# Altium PCB PCB1.PcbDoc (part 1 of 2)
Units mil, origin at the board's own origin, x right, y up, seen from the top; angles counter-clockwise.
Board outline 3975 x 3295 mil, 2 copper layers (Top Layer, Bottom Layer); 85 components, 105 nets, 658 pads, 194 vias.
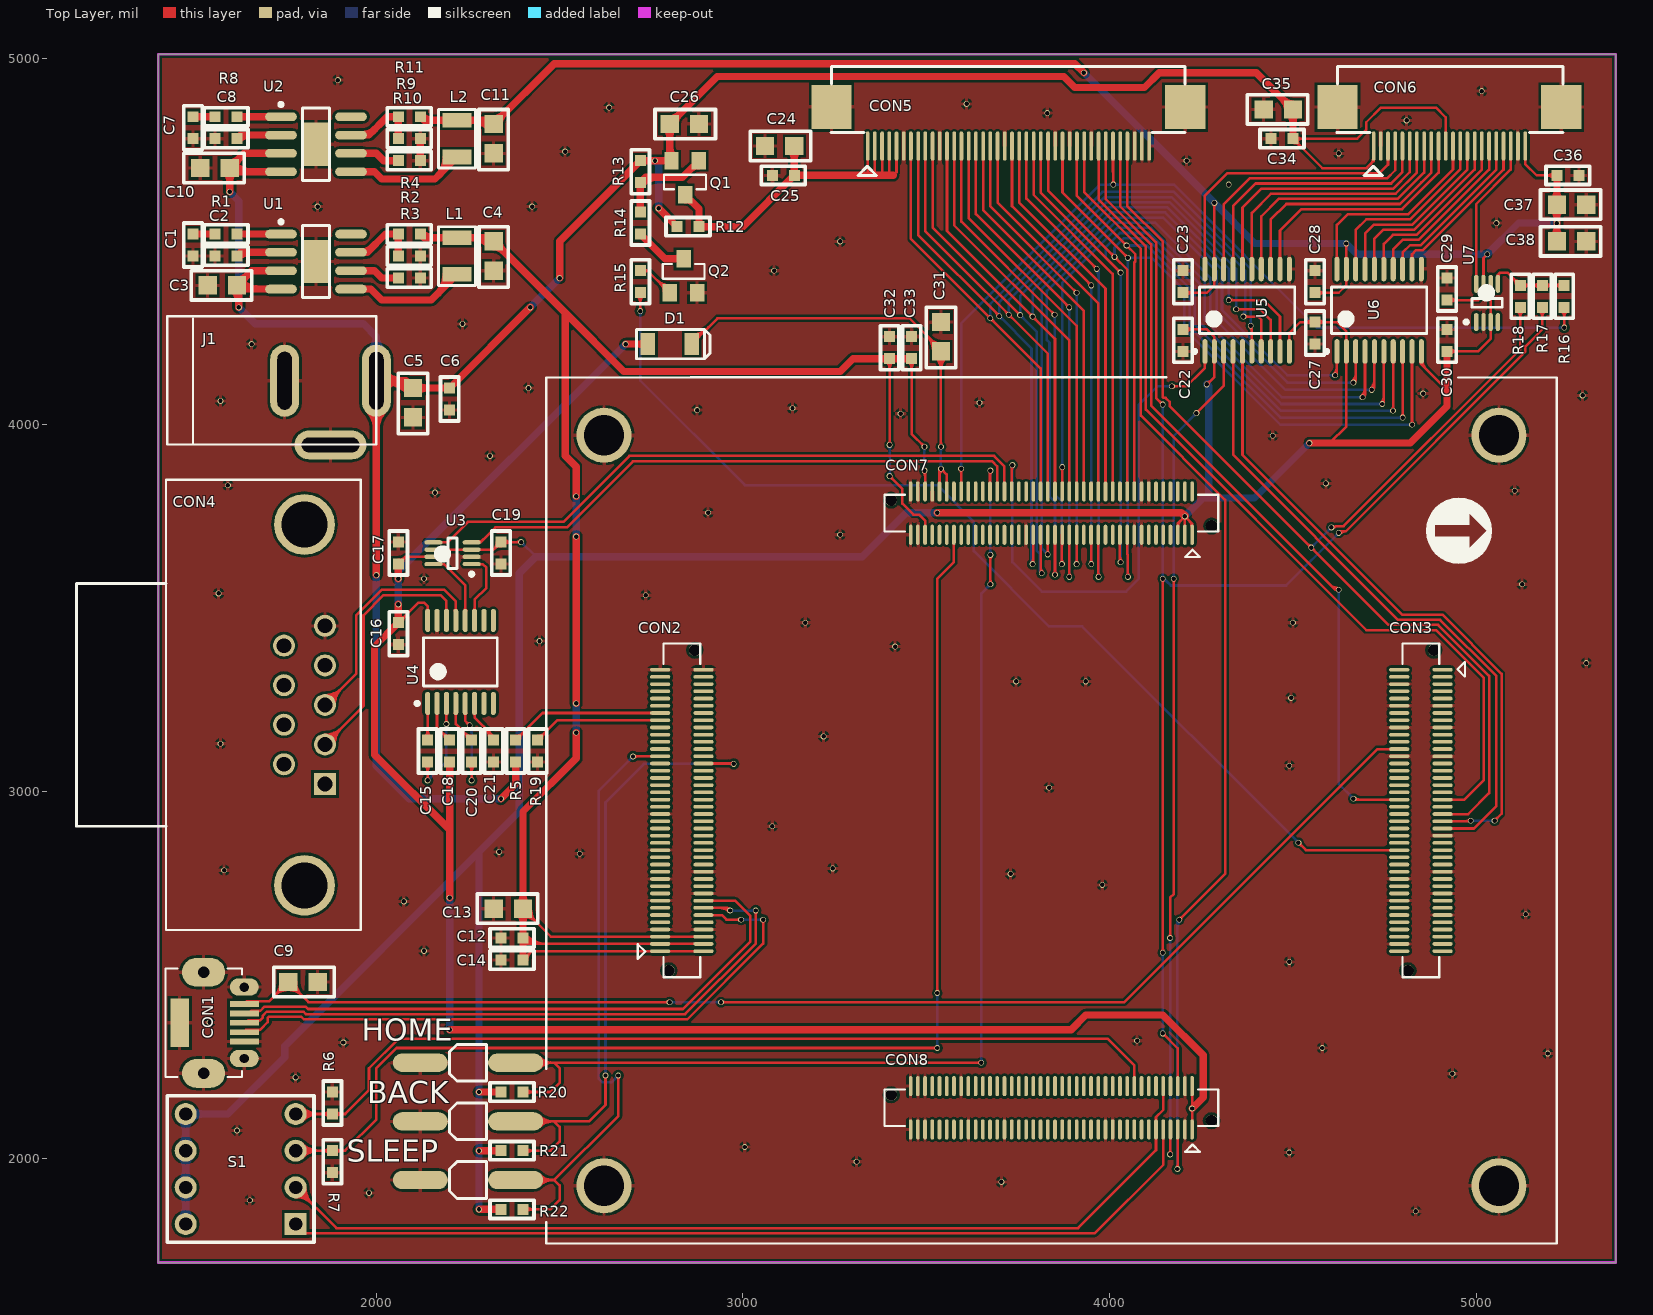
[diagram p0: Top Layer view]
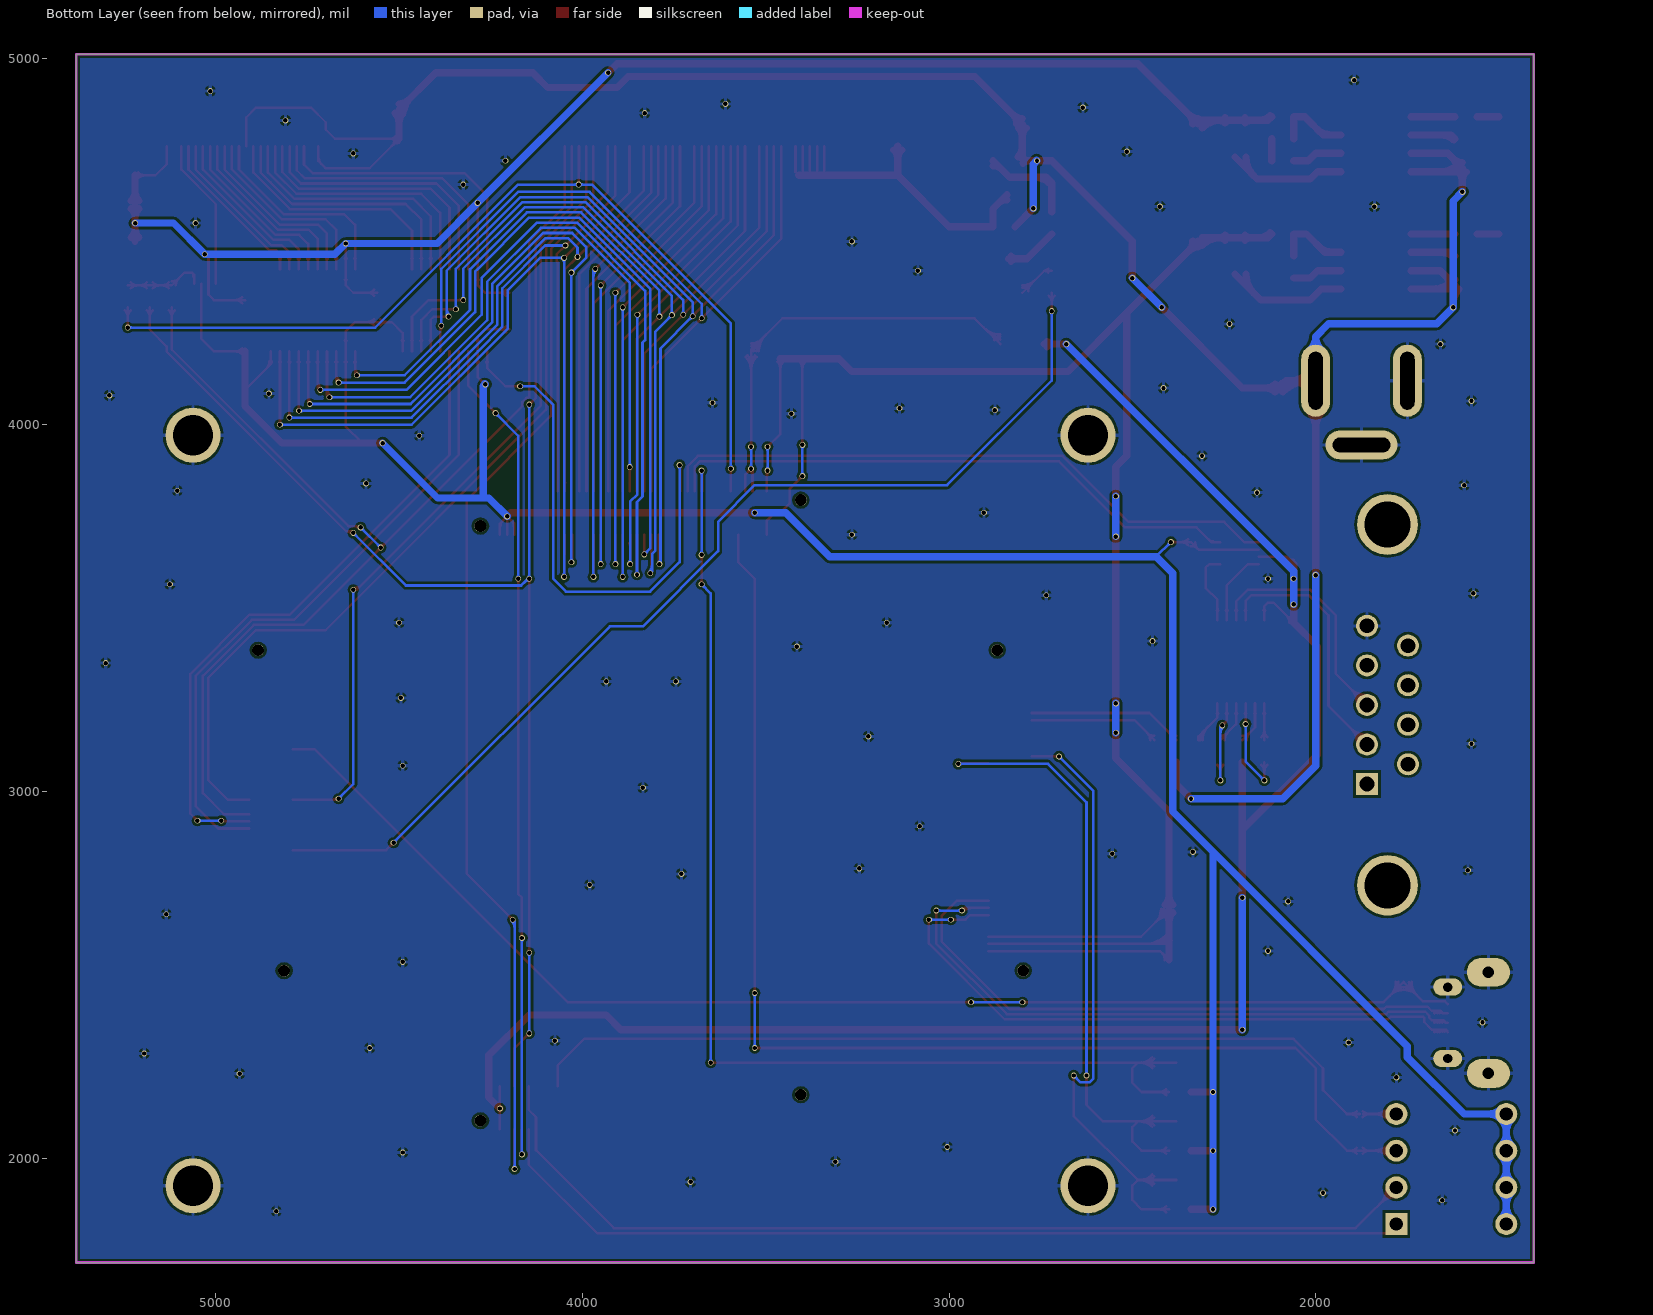
[diagram p1: Bottom Layer view, seen from below]

## Layer stack, top to bottom
Top Layer: signal copper 1.4
Dielectric: dielectric 12.6, FR-4, Dk 4.8
Bottom Layer: signal copper 1.4

## Board outline
1405,1715 1405,5010 5380,5010 5380,1715

## Design rules (kind name [scope] priority, off if disabled: settings)
Clearance [All] p1: gap=7
ComponentClearance [All] p1 off: gap=10 collisioncheckmode=3 verticalgap=10 showdistances=FALSE
HoleSize [All] p1: absolutevalues=TRUE maxlimit=1000 minlimit=1 maxpercent=80.000 minpercent=20.000
MinimumSolderMaskSliver [All] p1 off: minsoldermaskwidth=10
PolygonConnect [All] p1: connectstyle=Relief reliefconductorwidth=10 reliefentries=4 polygonreliefangle="90 Angle"
RoutingVias [All] p1: holewidth=12 width=16 viastyle="Through Hole" minholewidth=12 minwidth=16 maxholewidth=12 maxwidth=16
SilkToSilkClearance [All] p1 off: silktosilkclearance=10
SilkscreenOverComponentPads [All] p1 off: minsilkscreentomaskgap=10
SolderMaskExpansion [All] p1: expansion=4
Width Width-OTHER [Not InNetClass('POWER')] p1: maxlimit=7 minlimit=7 preferedwidth=7
Width Width-POWER [InNetClass('POWER')] p2: maxlimit=20 minlimit=7 preferedwidth=20
23 further rules are at their usual default settings.

## Classes and differential pairs
net class POWER: DC33V GND NetC1_1 NetC2_1 NetC7_1 NetC8_1 NetL1_1 NetL2_1 NetQ1_1 NetQ2_3 NetR1_2 NetR2_1 NetR3_1 NetR8_2 NetR9_1 NetR10_1 VDD1V8_EXT VDD25 VSYS VSYS_K VSYS_LCD

## Components (designator, comment, footprint, x,y, rotation, side; value= is the part's Value field where it differs from the comment)
BACK "KEY" KEY(3*6*2.5) 2380,2100 r180 top (schematic designator K2)
C1 "Cap" 0603 1500,4520 r270 top
C2 "Cap" 0603 1620,4460 r180 top
C3 "Cap" 0805 1540,4380 r0 top
C4 "Cap" 0805 2320,4420 r90 top
C5 "Cap" 0805 2100,4020 r90 top
C6 "Cap" 0603 2200,4100 r270 top
C7 "Cap" 0603 1500,4840 r270 top
C8 "Cap" 0603 1620,4780 r180 top
C9 "Cap" 0805 1840,2480 r180 top
C10 "Cap" 0805 1520,4700 r0 top
C11 "Cap" 0805 2320,4740 r90 top
C12 "Cap" 0603 2400,2600 r180 top
C13 "Cap" 0805 2320,2680 r0 top
C14 "Cap" 0603 2400,2540 r180 top
C15 "Cap" 0603 2140,3080 r90 top
C16 "Cap" 0603 2060,3460 r270 top
C17 "Cap" 0603 2060,3680 r270 top
C18 "Cap" 0603 2200,3080 r90 top
C19 "Cap" 0603 2340,3620 r90 top
C20 "Cap" 0603 2260,3140 r270 top
C21 "Cap" 0603 2320,3080 r90 top
C22 "Cap" 0603 4200,4200 r90 top
C23 "Cap" 0603 4200,4360 r90 top
C24 "Cap" 0805 3140,4760 r180 top
C25 "Cap" 0603 3080,4680 r0 top
C26 "Cap" 0805 2880,4820 r180 top
C27 "Cap" 0603 4560,4220 r90 top
C28 "Cap" 0603 4560,4360 r90 top
C29 "Cap" 0603 4920,4400 r270 top
C30 "Cap" 0603 4920,4260 r270 top
C31 "Cap" 0805 3540,4200 r90 top
C32 "Cap" 0603 3400,4180 r90 top
C33 "Cap" 0603 3460,4180 r90 top
C34 "Cap" 0603 4440,4780 r0 top
C35 "Cap" 0805 4420,4860 r0 top
C36 "Cap" 0603 5220,4680 r0 top
C37 "Cap" 0805 5220,4600 r0 top
C38 "Cap" 0805 5220,4500 r0 top
CON1 "USB-CON" USB-CON 1640,2420 r0 top
CON2 "PCB-CON-80" PCB-CON-80 2774.21,2564.18 r90 top
CON3 "PCB-CON-80" PCB-CON-80 4908.07,3331.89 r270 top
CON4 "USART-CON" USART-CON 1860,3020 r270 top
CON5 "FPC-CON-40P" FPC-CON-40P 3340,4760 r0 top
CON6 "FPC-CON-22P" FPC-CON-22P 4720,4760 r0 top
CON7 "PCB-CON-80" PCB-CON-80 4225,3700 r180 top
CON8 "PCB-CON-80" PCB-CON-80 4225,2077.95 r180 top
D1 "1N4148" 1206 2800,4220 r0 top
HOME "KEY" KEY(3*6*2.5) 2380,2260 r180 top (schematic designator K1)
J1 "JACK-DC" JACK-DC 2000,4120 r180 top
L1 "Inductor" 1008 2220,4460 r90 top
L2 "Inductor" 1008 2220,4780 r90 top
Q1 "AO3415A" SOT-23 2880,4720 r180 top
Q2 "9014" SOT-23 2800,4360 r0 top
R1 "Res2" 0603 1560,4520 r0 top
R2 "Res2" 0603 2060,4460 r0 top
R3 "Res2" 0603 2060,4400 r0 top
R4 "Res2" 0603 2120,4520 r180 top
R5 "Res2" 0603 2380,3080 r90 top
R6 "Res2" 0603 1880,2120 r90 top
R7 "Res2" 0603 1880,1960 r90 top
R8 "Res2" 0603 1560,4840 r0 top
R9 "Res2" 0603 2060,4780 r0 top
R10 "Res2" 0603 2060,4720 r0 top
R11 "Res2" 0603 2120,4840 r180 top
R12 "Res2" 0603 2820,4540 r0 top
R13 "Res2" 0603 2720,4660 r90 top
R14 "Res2" 0603 2720,4520 r90 top
R15 "Res2" 0603 2720,4360 r90 top
R16 "Res2" 0603 5240,4320 r90 top
R17 "Res2" 0603 5180,4320 r90 top
R18 "Res2" 0603 5120,4320 r90 top
R19 "Res2" 0603 2440,3080 r90 top
R20 "Res2" 0603 2340,2180 r0 top
R21 "Res2" 0603 2340,2020 r0 top
R22 "Res2" 0603 2340,1860 r0 top
S1 "SW DIP-4" SW-4 1780,1820 r90 top
SLEEP "KEY" KEY(3*6*2.5) 2380,1940 r180 top (schematic designator K3)
U1 "RT8065" RT8065(SOP8) 1740,4520 r0 top
U2 "RT8065" RT8065(SOP8) 1740,4840 r0 top
U3 "TXS0102" TXS0102(SOP8) 2260,3620 r180 top
U4 "MAX3232" MAX3232(SOP16) 2140,3240 r90 top
U5 "TXS0108E" TXS0108E(SOP20) 4260,4200 r90 top
U6 "TXS0108E" TXS0108E(SOP20) 4620,4200 r90 top
U7 "TXS0102" TXS0102(SOP8) 5000,4280 r90 top

## Footprints (in the part's own frame and the unit in brackets; to place one, negate y for a bottom-side part, rotate by r counter-clockwise, add the part's x,y. Pads: shape width x height; smd on the part's side, far side on the other; paste and mask are expansions set on the pad)
0603 [mil]
  rect 30x30 smd: 1(0,0) 2(60,0)
  silkscreen extent -30,-25 90,25
0805 [mil]
  rect 50x50 smd: 1(0,0) 2(80,0)
  silkscreen extent -45,-40 120,40
1008 [mil]
  rect 40x80 smd: 1(-50,0) 2(50,0)
  silkscreen extent -80,-50 80,50
1206 [mil]
  rect 40x60 smd: 1(-60,0) 2(60,0)
  silkscreen extent -90,-40 110,40
FPC-CON-22P [mil]
  oval 10x80 smd: 1(0,0) 2(19.69,0) 3(39.37,0) 4(59.06,0) 5(78.74,0) 6(98.43,0) 7(118.11,0) 8(137.8,0) 9(157.48,0) 10(177.16,0) 11(196.85,0) 12(216.53,0) 13(236.22,0) 14(255.9,0) 15(275.59,0) 16(295.27,0) 17(314.96,0) 18(334.65,0) 19(354.33,0) 20(374.02,0) 21(393.7,0) 22(413.39,0)
  rect 110x120 smd: 23(-98.43,106.3) 24(511.81,106.3)
  silkscreen extent -100,-80 516,217
FPC-CON-40P [mil]
  oval 10x80 smd: 1(0,0) 2(19.68,0) 3(39.37,0) 4(59.05,0) 5(78.74,0) 6(98.43,0) 7(118.11,0) 8(137.8,0) 9(157.48,0) 10(177.16,0) 11(196.85,0) 12(216.53,0) 13(236.22,0) 14(255.91,0) 15(275.59,0) 16(295.28,0) 17(314.96,0) 18(334.64,0) 19(354.33,0) 20(374.01,0) 21(393.7,0) 22(413.39,0) 23(433.07,0) 24(452.76,0) 25(472.44,0) 26(492.13,0) 27(511.81,0) 28(531.5,0) 29(551.18,0) 30(570.87,0) 31(590.55,0) 32(610.24,0) 33(629.92,0) 34(649.61,0) 35(669.29,0) 36(688.98,0) 37(708.66,0) 38(728.35,0) 39(748.03,0) 40(767.72,0)
  rect 110x120 smd: 41(-98.43,106.3) 42(866.14,106.3)
  silkscreen extent -100,-80 866,217
JACK-DC [mm]
  oval 2x5 hole 1 slot 4 at 90 deg: 1(0,0) 2(6.35,0)
  oval 5x2 hole 1 slot 4 at 0 deg: 3(3.175,4.445)
  silkscreen extent 0,-4.47 14.48,4.42
KEY(3*6*2.5) [mil]
  oval 150x50 smd: 1(0,0) 2(260,0)
  silkscreen extent 80,-50 180,50
MAX3232(SOP16) [mm] "SOP, 16-Leads, Body 5.1x4.5mm (max), Pitch 0.65mm, IPC Medium Density"
  oval 1.6x0.35 smd: 1(0,0) 2(0,-0.65) 3(0,-1.3) 4(0,-1.95) 5(0,-2.6) 6(0,-3.25) 7(0,-3.9) 8(0,-4.55) 9(5.75,-4.55) 10(5.75,-3.9) 11(5.75,-3.25) 12(5.75,-2.6) 13(5.75,-1.95) 14(5.75,-1.3) 15(5.75,-0.65) 16(5.75,0)
  silkscreen extent -0.12,-4.82 4.55,0.85, body extent 0.63,-4.82 5.13,0.28, height 2.65
PCB-CON-80 [mil]
  oval 10x55 smd: 1(0,0) 2(0,-118.12) 3(19.69,0) 4(19.69,-118.12) 5(39.37,0) 6(39.37,-118.12) 7(59.06,0) 8(59.06,-118.12) 9(78.74,0) 10(78.74,-118.12) 11(98.43,0) 12(98.43,-118.12) 13(118.11,0) 14(118.11,-118.12) 15(137.8,0) 16(137.8,-118.12) 17(157.48,0) 18(157.48,-118.12) 19(177.17,0) 20(177.17,-118.12) 21(196.85,0) 22(196.85,-118.12) 23(216.54,0) 24(216.54,-118.12) 25(236.22,0) 26(236.22,-118.12) 27(255.91,0) 28(255.91,-118.12) 29(275.59,0) 30(275.59,-118.12) 31(295.28,0) 32(295.28,-118.12) 33(314.96,0) 34(314.96,-118.12) 35(334.65,0) 36(334.65,-118.12) 37(354.33,0) 38(354.33,-118.12) 39(374.02,0) 40(374.02,-118.12) 41(393.7,0) 42(393.7,-118.12) 43(413.39,0) 44(413.39,-118.12) 45(433.07,0) 46(433.07,-118.12) 47(452.76,0) 48(452.76,-118.12) 49(472.44,0) 50(472.44,-118.12) 51(492.13,0) 52(492.13,-118.12) 53(511.81,0) 54(511.81,-118.12) 55(531.5,0) 56(531.5,-118.12) 57(551.18,0) 58(551.18,-118.12) 59(570.87,0) 60(570.87,-118.12) 61(590.55,0) 62(590.55,-118.12) 63(610.24,0) 64(610.24,-118.12) 65(629.92,0) 66(629.92,-118.12) 67(649.61,0) 68(649.61,-118.12) 69(669.29,0) 70(669.29,-118.12) 71(688.98,0) 72(688.98,-118.12) 73(708.66,0) 74(708.66,-118.12) 75(728.35,0) 76(728.35,-118.12) 77(748.03,0) 78(748.03,-118.12) 79(767.72,0) 80(767.72,-118.12)
  round 32 / inner round 60 / far side round 32 hole 32: " "(-53.15,-23.63) " "(820.87,-94.49)
  silkscreen extent -71,-109 839,61
RT8065(SOP8) [mm] "SOP, 8-Leads, Body 5.0x4.0mm (max), Pitch 1.27mm, IPC Medium Density"
  oval 2.2x0.6 smd: 1(0,0) 2(0,-1.27) 3(0,-2.54) 4(0,-3.81) 5(4.85,-3.81) 6(4.85,-2.54) 7(4.85,-1.27) 8(4.85,0)
  rect 2.1x3 smd: 9(2.425,-1.905)
  silkscreen extent -0.12,-4.41 3.35,0.97, body extent 0.43,-4.41 4.43,0.6, height 2.65
SOT-23 [mm]
  rect 1x1.2 smd: 1(0,0) 2(1.905,0) 3(0.965,2.349)
  silkscreen extent -0.48,0.97 2.41,1.98
SW-4 [mil]
  rect 60x60 hole 36: 1(0,0)
  round 60 hole 36: 2(100,0) 3(200,0) 4(300,0) 5(300,300) 6(200,300) 7(100,300) 8(0,300)
  silkscreen extent -50,-50 350,350
TXS0102(SOP8) [mm] "SSOP, 8-Leads, Body 2.1x2.4mm (max), Pitch 0.50mm, IPC Medium Density"
  oval 1.25x0.3 smd: 1(0,0) 2(0,-0.5) 3(0,-1) 4(0,-1.5) 5(2.65,-1.5) 6(2.65,-1) 7(2.65,-0.5) 8(2.65,0)
  silkscreen extent -0.13,-1.8 2.32,0.82, body extent 0.13,-1.8 2.53,0.3, height 2.65
TXS0108E(SOP20) [mm] "SOP, 20-Leads, Body 6.6x4.5mm (max), Pitch 0.65mm, IPC Medium Density"
  oval 1.7x0.35 smd: 1(0,0) 2(0,-0.65) 3(0,-1.3) 4(0,-1.95) 5(0,-2.6) 6(0,-3.25) 7(0,-3.9) 8(0,-4.55) 9(0,-5.2) 10(0,-5.85) 11(5.7,-5.85) 12(5.7,-5.2) 13(5.7,-4.55) 14(5.7,-3.9) 15(5.7,-3.25) 16(5.7,-2.6) 17(5.7,-1.95) 18(5.7,-1.3) 19(5.7,-0.65) 20(5.7,0)
  silkscreen extent -0.12,-6.22 4.45,0.85, body extent 0.6,-6.22 5.1,0.38, height 2.65
USART-CON [mil]
  rect 60x60 / inner round 60 / far side rect 60x60 hole 40: 1(0,0)
  round 60 hole 40: 2(-107.87,0) 3(-215.75,0) 4(-323.62,0) 5(-431.5,0) 6(-53.94,-111.81) 7(-161.81,-111.81) 8(-269.68,-111.81) 9(-377.56,-111.81)
  round 165.35 / inner round 60 / far side round 165.35 hole 125.98: 10(276.38,-55.91) 11(-707.87,-55.91)
  silkscreen extent -830,-678 398,98
USB-CON [mm] "MICROUSB-B-H4"
  rect 2x0.4 smd: 1(0,0) 2(0,-0.65) 3(0,-1.3) 4(0,-1.95) 5(0,-2.6)
  oval 2x1.2 / inner round 1.524 / far side oval 2x1.2 hole 0.65: 6(0,1.175) 7(0,-3.775)
  oval 3x2 / inner round 1.524 / far side oval 3x2 hole 0.8: 8(-2.825,2.2) 9(-2.825,-4.8)
  rect 1.3x3.35 smd: 10(-4.48,-1.3)
  silkscreen extent -5.45,-5.05 -0.15,2.45

## Part data
C1 C2 C3 C4 C5 C6 C7 C8 C9 C10 C11 C12 C13 C14 C15 C16 C17 C18 C19 C20 C21 C22 C23 C24 C25 C26 C27 C28 C29 C30 C31 C32 C33 C34 C35 C36 C37 C38: "Capacitor"
D1: library part Diode, "Default Diode"
R1 R2 R3 R4 R5 R6 R7 R8 R9 R10 R11 R12 R13 R14 R15 R16 R17 R18 R19 R20 R21 R22: "Resistor"
S1: "DIP Switch, 4 Position, SPST"

## Free pads (board coordinates)
  round 150 hole 110: 0(2620.97,1924.2) 0(2620.97,3971.44) 0(5061.91,1924.2) 0(5061.91,3971.44)

## Via types
v1: diameter 16, hole 12, Top Layer to Bottom Layer, 194 vias

## Nets (pads, with @x,y where several pads share a name; then routed paths per layer and width w, separated by ;. In a path a pad name is that pad's centre, name@x,y a point inside that pad or via, vN(x,y) a via of type N, cw(c..) or ccw(c..) an arc to the next point about the centre after c; other vN are vias at no path point)
ACOKB_CHARGER: CON2.65 R19.2 | length 400.2
  Top Layer w7: R19.2@2440,3140 2494.09,3194.09 CON2.65@2774.21,3194.09 ; R19.2@2440,3151.5 ccw(c2440,3179.26) 2459.63,3159.63 ccw(c2479.26,3140) R19.2@2451.5,3140
AP_SLEEP: CON7.67 R7.2 S1.3 | length 3744.1
  Top Layer w7: S1.3@1780,2020 R7.2@1880,2020 1915,2020 2000,2105 2000,2245 2055,2300 v1(3530,2300) ; S1.3@1788.84,2011.16 cw(c1810.18,1989.82) 1810.18,2020 cw(c1810.18,2050.18) S1.3@1788.84,2028.84 ; S1.3@1793.79,2006.21 cw(c1827.08,1972.92) 1827.08,2020 cw(c1827.08,2067.08) S1.3@1793.79,2033.79 ; S1.3@1798.74,2001.26 cw(c1843.98,1956.02) 1843.98,2020 cw(c1843.98,2083.98) S1.3@1798.74,2038.74 ; R7.2@1871.87,2011.87 ccw(c1852.24,1992.24) 1852.24,2020 ccw(c1852.24,2047.76) R7.2@1871.87,2028.13 ; R7.2@1888.13,2011.87 cw(c1907.76,1992.24) 1907.76,2020 cw(c1907.76,2047.76) R7.2@1888.13,2028.13 ; v1@3526.82,2296.82 ccw(c3519.14,2289.14) 3519.14,2300 ccw(c3519.14,2310.86) v1@3526.82,2303.18 ; v1@3526.82,2453.18 ccw(c3519.14,2460.86) 3530,2460.86 ccw(c3540.86,2460.86) v1@3533.18,2453.18 ; v1(3530,2450) 3530,3580 3575.39,3625.39 CON7.67@3575.39,3700
  Bottom Layer w7: v1@3526.82,2303.18 ccw(c3519.14,2310.86) 3530,2310.86 ccw(c3540.86,2310.86) v1@3533.18,2303.18 ; v1@3526.82,2446.82 cw(c3519.14,2439.14) 3530,2439.14 cw(c3540.86,2439.14) v1@3533.18,2446.82 ; v1(3530,2300) v1(3530,2450)
BK_LED: CON7.52 U5.1 | length 1550.1
  Top Layer w7: CON7.52@3732.87,3818.12 3732.87,3887.87 v1(3735,3890) ; 3732.87,3873.99 cw(c3751.01,3873.99) v1@3738.18,3886.82 ; v1(4170,4105) 4210,4105 4250,4145 4260,4155 U5.1@4260,4200 ; v1@4173.18,4101.82 cw(c4180.86,4094.14) 4180.86,4105 cw(c4180.86,4115.86) v1@4173.18,4108.18 ; U5.1@4257.6,4171.03 cw(c4251.82,4165.24) 4260,4165.24 cw(c4268.18,4165.24) U5.1@4262.4,4171.03
  Bottom Layer w7: v1@3731.82,3886.82 cw(c3724.14,3879.14) 3735,3879.14 cw(c3745.86,3879.14) v1@3738.18,3886.82 ; v1(3735,3890) 3735,3625 3815,3545 4045,3545 4080,3580 4080,4055 4130,4105 v1(4170,4105) ; v1@4166.82,4101.82 ccw(c4159.14,4094.14) 4159.14,4105 ccw(c4159.14,4115.86) v1@4166.82,4108.18
BUF_XURXD2: U3.8 U4.12 | length 219.6
  Top Layer w7: U3.8@2155.67,3620 2185,3620 2242.36,3562.64 U4.12@2242.36,3466.38 ; U4.12@2239.97,3493.38 ccw(c2234.18,3499.17) 2242.36,3499.17 ccw(c2250.55,3499.17) U4.12@2244.76,3493.38
BUF_XUTXD2: U3.1 U4.11 | length 213.9
  Top Layer w7: U3.1@2260,3620 2290,3620 2300,3610 2300,3555 2267.95,3522.95 U4.11@2267.95,3466.38 ; U4.11@2265.56,3493.38 ccw(c2259.77,3499.17) 2267.95,3499.17 ccw(c2276.14,3499.17) U4.11@2270.35,3493.38
CAM5M_RST: CON3.41 CON5.37 R18.1 | length 3437.5
  Top Layer w7: CON5.37@4048.66,4760 4048.66,4595.53 4145,4499.2 4145,4074.8 4146.3,4073.5 4152.66,4073.5 4163.5,4062.66 4163.5,4051.5 4761,3454 4895.8,3454 5035,3314.8 5035,2995 4978.2,2938.2 CON3.41@4908.07,2938.2 ; v1@4545.5,3665 ccw(c4534.64,3665) 4542.32,3672.68 ccw(c4550,3680.36) v1@4550,3669.5 ; v1@4550,3660.5 cw(c4550,3649.64) 4557.68,3657.32 cw(c4565.36,3665) v1@4554.5,3665 ; v1(4605,3720) 4613.84,3720 4617.34,3723.5 ; v1@4608.05,3723.31 ccw(c4612.59,3728.24) 4617.34,3723.5 ; R18.1@5111.87,4311.87 cw(c5092.24,4292.24) 5120,4292.24 cw(c5147.76,4292.24) R18.1@5128.13,4311.87 ; R18.1@5120,4320 5120,4205 4638.5,3723.5 4617.34,3723.5
  Bottom Layer w7: v1(4550,3665) v1(4605,3720) ; v1@4550,3669.5 ccw(c4550,3680.36) 4557.68,3672.68 ccw(c4565.36,3665) v1@4554.5,3665 ; v1@4600.5,3720 cw(c4589.64,3720) 4597.32,3712.32 cw(c4605,3704.64) v1@4605,3715.5
CHG_DOK: CON2.67 R5.2 | length 468.4
  Top Layer w7: R5.2@2380,3140 2453.78,3213.78 CON2.67@2774.21,3213.78 ; R5.2@2380,3151.5 ccw(c2380,3179.26) 2399.63,3159.63 ccw(c2419.26,3140) R5.2@2391.5,3140
CHG_EN: CON3.52 R15.1 | length 2999
  Top Layer w7: R15.1@2711.87,4351.87 cw(c2692.24,4332.24) 2720,4332.24 cw(c2747.76,4332.24) R15.1@2728.13,4351.87 ; v1@2716.82,4313.18 ccw(c2709.14,4320.86) 2720,4320.86 ccw(c2730.86,4320.86) v1@2723.18,4313.18 ; v1(2720,4310) R15.1@2720,4360 ; v1@4515,2855.5 cw(c4515,2844.64) 4522.68,2852.32 cw(c4530.36,2860) v1@4519.5,2860 ; v1(4515,2860) 4535.24,2839.76 CON3.52@4789.96,2839.76
  Bottom Layer w7: v1@2716.82,4306.82 cw(c2709.14,4299.14) 2720,4299.14 cw(c2730.86,4299.14) v1@2723.18,4306.82 ; v1(2720,4310) 2720,4120 3005,3835 3530,3835 3630,3735 3630,3655 3835,3450 3925,3450 v1(4515,2860) ; v1@4510.5,2860 ccw(c4499.64,2860) 4507.32,2867.68 ccw(c4515,2875.36) v1@4515,2864.5
CLOCK: CON6.19 U6.12 | length 462.7
  Top Layer w7: U6.12@4822.33,4453.38 ccw(c4816.54,4459.17) 4824.72,4459.17 ccw(c4832.91,4459.17) U6.12@4827.12,4453.38 ; U6.12@4824.72,4424.41 4824.72,4464.72 4836,4476 4854.59,4476 5074.33,4695.74 CON6.19@5074.33,4760
DATA0: CON6.15 U6.16 | length 511.1
  Top Layer w7: U6.16@4719.97,4453.38 ccw(c4714.18,4459.17) 4722.36,4459.17 ccw(c4730.55,4459.17) U6.16@4724.76,4453.38 ; U6.16@4722.36,4424.41 4722.36,4507.36 4747,4532 4831.4,4532 4995.59,4696.19 CON6.15@4995.59,4760
DATA1: CON6.14 U6.17 | length 525.3
  Top Layer w7: U6.17@4694.37,4453.38 ccw(c4688.59,4459.17) 4696.77,4459.17 ccw(c4704.96,4459.17) U6.17@4699.17,4453.38 ; U6.17@4696.77,4424.41 4696.77,4521.77 4721,4546 4825.6,4546 4975.9,4696.31 CON6.14@4975.9,4760
DATA2: CON6.13 U6.18 | length 536.7
  Top Layer w7: U6.18@4668.78,4453.38 ccw(c4663,4459.17) 4671.18,4459.17 ccw(c4679.36,4459.17) U6.18@4673.58,4453.38 ; U6.18@4671.18,4424.41 4671.18,4531.18 4700,4560 4819.8,4560 4956.22,4696.42 CON6.13@4956.22,4760
DATA3: CON6.12 U6.20 | length 576.2
  Top Layer w7: U6.20@4617.6,4453.38 ccw(c4611.82,4459.17) 4620,4459.17 ccw(c4628.18,4459.17) U6.20@4622.4,4453.38 ; U6.20@4620,4424.41 4620,4545 4649,4574 4814,4574 4936.53,4696.53 CON6.12@4936.53,4760
DATA4: CON6.10 U5.12 | length 688.4
  Top Layer w7: U5.12@4462.33,4453.38 ccw(c4456.54,4459.17) 4464.72,4459.17 ccw(c4472.91,4459.17) U5.12@4467.12,4453.38 ; U5.12@4464.72,4424.41 4464.72,4529.72 4523,4588 4797.4,4588 4803.4,4594 4803.49,4594 4897.16,4687.67 CON6.10@4897.16,4760
DATA5: CON6.9 U5.13 | length 711.4
  Top Layer w7: U5.13@4436.74,4453.38 ccw(c4430.95,4459.17) 4439.13,4459.17 ccw(c4447.32,4459.17) U5.13@4441.53,4453.38 ; U5.13@4439.13,4424.41 4439.13,4559.13 4482,4602 4791.6,4602 4850.65,4661.05 4850.75,4661.05 4877.48,4687.78 CON6.9@4877.48,4760
DATA6: CON6.8 U5.14 | length 722.8
  Top Layer w7: U5.14@4411.15,4453.38 ccw(c4405.36,4459.17) 4413.54,4459.17 ccw(c4421.73,4459.17) U5.14@4415.94,4453.38 ; U5.14@4413.54,4424.41 4413.54,4568.54 4461,4616 4785.8,4616 4844.85,4675.05 4844.95,4675.05 4857.8,4687.9 CON6.8@4857.8,4760
DATA7: CON6.7 U5.15 | length 734.1
  Top Layer w7: U5.15@4385.56,4453.38 ccw(c4379.77,4459.17) 4387.95,4459.17 ccw(c4396.14,4459.17) U5.15@4390.35,4453.38 ; U5.15@4387.95,4424.41 4387.95,4577.95 4440,4630 4780,4630 4838.11,4688.11 CON6.7@4838.11,4760
DC33V: C16.1 C17.2 C18.1 CON8.1 CON8.2 D1.1 U3.7 U4.16 | length 5337.8
  Top Layer w7: C16.1@2060,3460 2115,3515 2130,3515 2140,3505 U4.16@2140,3466.38 ; C16.1@2060,3471.5 ccw(c2060,3499.26) 2079.63,3479.63 ccw(c2099.26,3460) C16.1@2071.5,3460 ; C17.2@2060,3620 2079.68,3639.68 U3.7@2155.67,3639.68 ; C17.2@2060,3631.5 ccw(c2060,3659.26) 2079.63,3639.63 ccw(c2099.26,3620) C17.2@2071.5,3620 ; U4.16@2137.6,3493.38 ccw(c2131.82,3499.17) 2140,3499.17 ccw(c2148.18,3499.17) U4.16@2142.4,3493.38 ; v1@4221.82,2131.82 cw(c4214.14,2124.14) 4225,2124.14 cw(c4235.86,2124.14) v1@4228.18,2131.82 ; v1@4221.82,2138.18 ccw(c4214.14,2145.86) 4225,2145.86 ccw(c4235.86,2145.86) v1@4228.18,2138.18 ; CON8.1@4225,2077.95 v1(4225,2135) CON8.2@4225,2196.07
  Top Layer w20: v1(2060,3510) C16.1@2060,3460 1995,3395 1995,3100 2200,2895 ; v1(2060,3580) C17.2@2060,3620 ; v1(2200,2350) 3895,2350 3935,2390 4145,2390 4255,2280 4255,2165 v1(4225,2135) ; v1(2200,2710) 2200,2895 ; C18.1@2200,3080 2200,2895 ; v1(2680,4220) D1.1@2740,4220 ; D1.1@2732.93,4212.93 ccw(c2715.86,4195.86) 2715.86,4220 ccw(c2715.86,4244.14) D1.1@2732.93,4227.07
  Bottom Layer w20: v1(2060,3510) v1(2060,3580) 2060,3600 v1(2680,4220) ; v1(2200,2350) v1(2200,2710)
GND: BACK.2 C1.2 C2.2 C3.1 C4.1 C5.1 C6.2 C7.2 C8.2 C9.1 C10.1 C11.1 C12.2 C13.1 C14.2 C16.2 C17.1 C19.1 C21.1 C22.1 C23.2 C24.2 C25.1 C26.1 C27.1 C28.2 C29.1 C30.1 C31.2 C32.2 C33.2 C34.1 C35.1 C36.2 C37.2 C38.2 CON1.5 CON1.6 CON1.7 CON1.8 CON1.9 CON1.10 CON2.7 CON2.8 CON2.15 CON2.18 CON2.21 CON2.24 CON2.29 CON2.39 CON2.79 CON2.80 CON3.6 CON3.11 CON3.12 CON3.17 CON3.18 CON3.25 CON3.26 CON3.47 CON3.57 CON3.60 CON3.63 CON3.66 CON3.69 CON3.78 CON4.5 CON5.6 CON5.11 CON5.20 CON5.27 CON5.29 CON5.32 CON5.38 CON5.39 CON5.40 CON5.41 CON5.42 CON6.2 CON6.21 CON6.23 CON6.24 CON7.14 CON7.15 CON7.16 CON7.17 CON7.47 CON7.74 CON7.77 CON7.78 CON7.79 CON7.80 CON8.3 CON8.4 CON8.23 CON8.25 CON8.53 CON8.63 CON8.66 CON8.75 CON8.76 CON8.77 CON8.78 CON8.79 CON8.80 HOME.2 J1.2 J1.3 pad.0 Q2.2 R2.2 R3.2 R6.2 R7.1 R9.2 R10.2 R19.1 SLEEP.2 U1.9 U2.9 U3.2 U4.15 U5.11 U6.11 U7.2 | length 60
  Top Layer w20: R10.2@2120,4720 R9.2@2120,4780
  other v1: 4835,1855 1655,1885 1980,1905 3705,1935 3310,1990 4490,2015 3005,2030 1620,2075 1780,2220 4935,2230 5195,2285 4580,2300 1910,2315 4075,2320 1545,2370 4490,2535 2130,2565 5135,2665 2075,2700 3980,2745 3730,2775 1585,2785 3245,2790 2555,2830 2335,2835 3080,2905 3835,3010 4490,3070 1575,3130 3220,3150 4495,3255 3745,3300 3935,3300 5300,3350 3415,3395 2445,3410 3170,3460 4500,3460 2735,3535 1570,3540 5125,3565 2130,3580 3265,3700 2905,3760 2160,3815 5105,3820 1595,3835 4590,3840 2310,3915 4445,3970 3430,4030 2875,4040 3135,4045 3645,4060 1575,4065 5290,4080 4855,4085 2415,4100 1660,4220 2235,4275 3085,4420 3265,4500 5055,4550 1840,4595 2425,4595 4325,4655 4210,4720 4625,4740 2515,4745 4810,4830 3830,4850 2635,4865 3610,4875 5015,4910 1895,4940
GPC1_1: CON8.7 U5.3 | length 2468.3
  Top Layer w7: v1@4161.82,2013.18 ccw(c4151.86,2023.14) 4165.94,2023.14 ; v1@4161.82,2603.18 ccw(c4154.14,2610.86) 4165,2610.86 ccw(c4175.86,2610.86) v1@4168.18,2603.18 ; v1(4165,2010) 4165.94,2010.94 CON8.7@4165.94,2077.95 ; v1(4165,2600) 4165,2710 4175,2720 v1(4175,3580) ; 4165.94,2018.59 ccw(c4173.59,2018.59) v1@4168.18,2013.18 ; v1@4171.82,3576.82 cw(c4164.14,3569.14) 4175,3569.14 cw(c4185.86,3569.14) v1@4178.18,3576.82 ; v1(4236.66,4031.66) 4311.18,4106.18 U5.3@4311.18,4200 ; v1@4236.66,4036.16 ccw(c4236.66,4047.02) 4244.34,4039.34 ccw(c4252.02,4031.66) v1@4241.16,4031.66 ; U5.3@4308.78,4171.03 cw(c4303,4165.24) 4311.18,4165.24 cw(c4319.36,4165.24) U5.3@4313.58,4171.03
  Bottom Layer w7: v1@4161.82,2013.18 ccw(c4154.14,2020.86) 4165,2020.86 ccw(c4175.86,2020.86) v1@4168.18,2013.18 ; v1@4161.82,2596.82 cw(c4154.14,2589.14) 4165,2589.14 cw(c4175.86,2589.14) v1@4168.18,2596.82 ; v1(4165,2010) v1(4165,2600) ; v1@4171.82,3583.18 ccw(c4164.14,3590.86) 4175,3590.86 ccw(c4185.86,3590.86) v1@4178.18,3583.18 ; v1(4175,3580) 4175,3970 v1(4236.66,4031.66) ; v1@4232.16,4031.66 cw(c4221.29,4031.66) 4228.98,4023.98 cw(c4236.66,4016.29) v1@4236.66,4027.16
GPX0_0: CON5.36 CON8.6 R17.1 | length 4260.5
  Top Layer w7: CON5.36@4028.98,4760 4028.98,4595.42 4127,4497.4 4127,4073 v1(4145,4055) ; v1@4140.5,4055 ccw(c4129.64,4055) 4137.32,4062.68 ccw(c4145,4070.36) v1@4145,4059.5 ; v1@4141.82,2563.18 ccw(c4134.14,2570.86) 4145,2570.86 ccw(c4155.86,2570.86) v1@4148.18,2563.18 ; v1@4141.82,3576.82 cw(c4134.14,3569.14) 4145,3569.14 cw(c4155.86,3569.14) v1@4148.18,3576.82 ; v1@4145,2335.5 cw(c4145,2324.64) 4152.68,2332.32 cw(c4160.36,2340) v1@4149.5,2340 ; v1(4145,2340) 4185.63,2299.37 CON8.6@4185.63,2196.07 ; v1(4145,2560) v1(4145,3580) ; v1(4625,3705) 4629.5,3709.5 4644.3,3709.5 ; v1@4628.45,3702.11 cw(c4644.3,3688.81) 4644.3,3709.5 ; R17.1@5171.87,4311.87 cw(c5152.24,4292.24) 5180,4292.24 cw(c5207.76,4292.24) R17.1@5188.13,4311.87 ; R17.1@5180,4320 5180,4260 5134,4214 5134,4199.2 4644.3,3709.5
  Bottom Layer w7: v1@4141.82,2343.18 ccw(c4134.14,2350.86) 4145,2350.86 ccw(c4155.86,2350.86) v1@4148.18,2343.18 ; v1@4141.82,2556.82 cw(c4134.14,2549.14) 4145,2549.14 cw(c4155.86,2549.14) v1@4148.18,2556.82 ; v1@4141.82,3583.18 ccw(c4134.14,3590.86) 4145,3590.86 ccw(c4155.86,3590.86) v1@4148.18,3583.18 ; v1@4141.82,4051.82 cw(c4134.14,4044.14) 4145,4044.14 cw(c4155.86,4044.14) v1@4148.18,4051.82 ; v1(4145,2340) v1(4145,2560) ; v1@4145,3575.5 cw(c4145,3555.37) 4159.23,3569.6 ; v1(4145,4055) v1(4145,3580) 4148.84,3580 4167.34,3561.5 4481.5,3561.5 v1(4625,3705) ; v1@4620.5,3705 cw(c4609.64,3705) 4617.32,3697.32 cw(c4625,3689.64) v1@4625,3700.5
GYRO_INT: CON2.55 R22.2 SLEEP.1 | length 1939
  Top Layer w7: SLEEP.1@2380,1940 2485,1940 ; R22.2@2400,1860 2475,1860 2500,1885 2500,1925 2485,1940 ; R22.2@2408.13,1851.87 cw(c2427.76,1832.24) 2427.76,1860 cw(c2427.76,1887.76) R22.2@2408.13,1868.13 ; SLEEP.1@2440.25,1929.75 cw(c2465.01,1904.99) 2465.01,1940 cw(c2465.01,1975.01) SLEEP.1@2440.25,1950.25 ; SLEEP.1@2445.2,1924.8 cw(c2481.91,1888.09) 2481.91,1940 cw(c2481.91,1991.91) SLEEP.1@2445.2,1955.2 ; v1@2656.82,2221.82 cw(c2649.14,2214.14) 2660,2214.14 cw(c2670.86,2214.14) v1@2663.18,2221.82 ; v1(2660,2225) 2660,2115 2485,1940 ; v1(2700,3095) 2700.68,3095.68 CON2.55@2774.21,3095.68 ; v1@2703.18,3091.82 cw(c2712.5,3082.5) 2712.5,3095.68 ; v1@2703.18,3098.18 ccw(c2709.23,3104.23) 2709.23,3095.68
  Bottom Layer w7: v1@2655.5,2225 cw(c2644.64,2225) 2652.32,2217.32 cw(c2660,2209.64) v1@2660,2220.5 ; v1(2660,2225) 2641.5,2206.5 2617.34,2206.5 2606.5,2217.34 2606.5,3001.5 v1(2700,3095) ; v1@2695.5,3095 cw(c2684.64,3095) 2692.32,3087.32 cw(c2700,3079.64) v1@2700,3090.5
HSYNC: CON6.18 U6.13 | length 471.1
  Top Layer w7: U6.13@4796.74,4453.38 ccw(c4790.95,4459.17) 4799.13,4459.17 ccw(c4807.32,4459.17) U6.13@4801.53,4453.38 ; U6.13@4799.13,4424.41 4799.13,4469.13 4820,4490 4848.79,4490 5054.65,4695.85 CON6.18@5054.65,4760
I2C_SCL6: CON3.43 U5.5 | length 1863.8
  Top Layer w7: U5.5@4359.97,4171.03 cw(c4354.18,4165.24) 4362.36,4165.24 cw(c4370.55,4165.24) U5.5@4364.76,4171.03 ; U5.5@4362.36,4200 4362.36,3917.64 4798,3482 4907.4,3482 5069,3320.4 5069,2939 v1(5050,2920) ; CON3.43@4908.07,2918.51 4983.51,2918.51 v1(4985,2920) ; 4970.53,2918.51 ccw(c4970.53,2934.47) v1@4981.82,2923.18 ; v1@5050,2924.5 ccw(c5050,2935.36) 5057.68,2927.68 ccw(c5065.36,2920) v1@5054.5,2920
  Bottom Layer w7: v1(4985,2920) v1(5050,2920) ; v1@4988.18,2916.82 cw(c4995.86,2909.14) 4995.86,2920 cw(c4995.86,2930.86) v1@4988.18,2923.18 ; v1@5046.82,2916.82 ccw(c5039.14,2909.14) 5039.14,2920 ccw(c5039.14,2930.86) v1@5046.82,2923.18
I2C_SCL7: CON3.38 CON5.34 | length 2282.5
  Top Layer w7: CON5.34@3989.61,4760 3989.61,4614.99 4113,4491.6 4113,4052 4615,3550 v1(4625,3550) ; 4600.25,3564.75 ccw(c4625,3589.51) v1@4625,3554.5 ; 4612.2,3552.8 ccw(c4625,3565.61) v1@4625,3547.5 ; v1(4665,2980) 4667.43,2977.57 CON3.38@4789.96,2977.57 ; v1@4668.18,2983.18 ccw(c4681.74,2996.74) 4681.74,2977.57
  Bottom Layer w7: v1@4621.82,3546.82 cw(c4614.14,3539.14) 4625,3539.14 cw(c4635.86,3539.14) v1@4628.18,3546.82 ; v1(4625,3550) 4625,3020 v1(4665,2980) ; v1@4660.5,2980 ccw(c4649.64,2980) 4657.32,2987.68 ccw(c4665,2995.36) v1@4665,2984.5
I2C_SDA6: CON3.45 U5.4 | length 1789.7
  Top Layer w7: U5.4@4334.37,4171.03 cw(c4328.59,4165.24) 4336.77,4165.24 cw(c4344.96,4165.24) U5.4@4339.17,4171.03 ; U5.4@4336.77,4200 4336.77,3918.23 4787,3468 4901.6,3468 5055,3314.6 5055,2960 4993.83,2898.83 CON3.45@4908.07,2898.83
I2C_SDA7: CON3.37 CON5.33 | length 2409.9
  Top Layer w7: CON5.33@3969.92,4760 3969.92,4614.88 4099,4485.8 4099,4041 4700,3440 4890,3440 5020,3310 5020,3030 4967.57,2977.57 CON3.37@4908.07,2977.57
LCD_DEN: CON5.25 CON7.21 U6.6 | length 2686.1
  Top Layer w7: CON5.25@3812.44,4760 3812.44,4632.56 v1(4030,4415) ; v1@4025.5,4415 ccw(c4014.64,4415) 4022.32,4422.68 ccw(c4030,4430.36) v1@4030,4419.5 ; v1@4028.15,3626.85 CON7.21@4028.15,3700 ; 4028.15,3640.32 ccw(c4045.32,3640.32) v1@4033.18,3628.18 ; v1@4740.32,4059.68 ccw(c4721.89,4078.11) 4747.95,4078.11 ; v1(4743.5,4056.5) 4747.95,4060.95 U6.6@4747.95,4200 ; U6.6@4745.56,4171.03 cw(c4739.77,4165.24) 4747.95,4165.24 cw(c4756.14,4165.24) U6.6@4750.35,4171.03
  Bottom Layer w7: v1@4025.5,4415 ccw(c4014.64,4415) 4022.32,4422.68 ccw(c4030,4430.36) v1@4030,4419.5 ; v1@4026.82,3628.18 ccw(c4019.14,3635.86) 4030,3635.86 ccw(c4040.86,3635.86) v1@4033.18,3628.18 ; v1@4026.82,4411.82 cw(c4019.14,4404.14) 4030,4404.14 cw(c4040.86,4404.14) v1@4033.18,4411.82 ; v1(4030,3625) v1(4030,4415) 3990,4455 3990,4485 4028,4523 4107,4523 4246,4384 4246,4279 4460,4065 ; 4460.2,4065 4468.7,4056.5 v1(4743.5,4056.5) ; v1@4740.32,4053.32 ccw(c4732.64,4045.64) 4732.64,4056.5 ccw(c4732.64,4067.36) v1@4740.32,4059.68
LCD_HSYNC: CON5.30 CON7.18 U6.8 | length 2296.7
  Top Layer w7: CON5.30@3910.87,4760 3910.87,4624.13 v1(4046.22,4488.78) 4070,4465 4070,4445 4067.52,4442.52 CON7.18@4067.52,3818.12 ; v1@4041.72,4488.78 ccw(c4030.85,4488.78) 4038.53,4496.47 ccw(c4046.22,4504.15) v1@4046.22,4493.28 ; v1@4046.22,4484.28 cw(c4046.22,4473.42) 4053.9,4481.1 cw(c4061.58,4488.78) v1@4050.72,4488.78 ; v1@4796.32,4022.68 ccw(c4789.52,4029.48) 4799.13,4029.48 ; U6.8@4796.74,4171.03 cw(c4790.95,4165.24) 4799.13,4165.24 cw(c4807.32,4165.24) U6.8@4801.53,4171.03 ; 4799.13,4031.25 ccw(c4811.25,4031.25) v1@4802.68,4022.68 ; U6.8@4799.13,4200 4799.13,4019.87 v1(4799.5,4019.5)
  Bottom Layer w7: v1(4046.22,4488.78) 4101.42,4488.78 4218,4372.2 4218,4267.4 4285.2,4200.2 4465.9,4019.5 v1(4799.5,4019.5) ; v1@4049.4,4485.6 cw(c4057.08,4477.92) 4057.08,4488.78 cw(c4057.08,4499.65) v1@4049.4,4491.97 ; v1@4796.32,4016.32 ccw(c4788.64,4008.64) 4788.64,4019.5 ccw(c4788.64,4030.36) v1@4796.32,4022.68
LCD_VD0: CON7.23
LCD_VD1: CON7.22
LCD_VD2: CON7.25
LCD_VD3: CON5.24 CON7.24 | length 1031.2
  Top Layer w7: CON5.24@3792.76,4760 3792.76,4627.24 4008.46,4411.54 CON7.24@4008.46,3818.12
LCD_VD4: CON5.23 CON7.27 | length 1445.1
  Top Layer w7: CON5.23@3773.07,4760 3773.07,4616.93 v1(3965,4425) ; v1@3960.5,4425 ccw(c3949.64,4425) 3957.32,4432.68 ccw(c3965,4440.36) v1@3965,4429.5 ; v1@3966.82,3588.18 ccw(c3961.33,3593.67) 3969.09,3593.67 ; 3969.09,3598.06 ccw(c3983.06,3598.06) v1@3973.18,3588.18 ; CON7.27@3969.09,3700 3969.09,3585.91 v1(3970,3585)
  Bottom Layer w7: v1@3961.82,4421.82 cw(c3942.07,4402.06) 3970,4402.06 ; v1(3965,4425) 3970,4420 v1(3970,3585) ; v1@3966.82,3588.18 ccw(c3959.14,3595.86) 3970,3595.86 ccw(c3980.86,3595.86) v1@3973.18,3588.18
LCD_VD5: CON5.22 CON7.26 | length 1039.4
  Top Layer w7: CON5.22@3753.39,4760 3753.39,4606.61 3988.78,4371.22 CON7.26@3988.78,3818.12
LCD_VD6: CON5.21 CON7.29 | length 1378.1
  Top Layer w7: CON5.21@3733.7,4760 3733.7,4596.3 v1(3950,4380) ; v1@3945.5,4380 ccw(c3934.64,4380) 3942.32,4387.68 ccw(c3950,4395.36) v1@3950,4384.5 ; v1@3946.82,3623.18 ccw(c3940.55,3629.45) 3949.41,3629.45 ; 3949.41,3632.28 ccw(c3962.28,3632.28) v1@3953.18,3623.18 ; CON7.29@3949.41,3700 3949.41,3620.59 v1(3950,3620)
  Bottom Layer w7: v1@3946.82,3623.18 ccw(c3939.14,3630.86) 3950,3630.86 ccw(c3960.86,3630.86) v1@3953.18,3623.18 ; v1@3946.82,4376.82 cw(c3939.14,4369.14) 3950,4369.14 cw(c3960.86,4369.14) v1@3953.18,4376.82 ; v1(3950,3620) v1(3950,4380)
LCD_VD7: CON5.19 CON7.28 | length 1055.7
  Top Layer w7: CON5.19@3694.33,4760 3694.33,4605.67 3969.09,4330.91 CON7.28@3969.09,3818.12
LCD_VD8: CON7.31
LCD_VD9: CON7.30
LCD_VD10: CON5.18 CON7.33 | length 1385.7
  Top Layer w7: CON5.18@3674.64,4760 3674.64,4595.35 v1(3910,4360) ; v1@3905.5,4360 ccw(c3894.64,4360) 3902.32,4367.68 ccw(c3910,4375.36) v1@3910,4364.5 ; v1@3906.82,3623.18 ccw(c3899.14,3630.86) 3910,3630.86 ccw(c3920.86,3630.86) v1@3913.18,3623.18 ; v1(3910,3620) CON7.33@3910.04,3700
  Bottom Layer w7: v1@3906.82,3623.18 ccw(c3899.14,3630.86) 3910,3630.86 ccw(c3920.86,3630.86) v1@3913.18,3623.18 ; v1@3906.82,4356.82 cw(c3899.14,4349.14) 3910,4349.14 cw(c3920.86,4349.14) v1@3913.18,4356.82 ; v1(3910,3620) v1(3910,4360)
LCD_VD11: CON5.17 CON7.32 | length 1055.7
  Top Layer w7: CON5.17@3654.96,4760 3654.96,4585.04 3929.72,4310.28 CON7.32@3929.72,3818.12
LCD_VD12: CON5.16 CON7.35 | length 1463.4
  Top Layer w7: CON5.16@3635.28,4760 3635.28,4574.73 v1(3890,4320) ; v1@3885.5,4320 ccw(c3874.64,4320) 3882.32,4327.68 ccw(c3890,4335.36) v1@3890,4324.5 ; v1@3886.82,3588.18 ccw(c3879.14,3595.86) 3890,3595.86 ccw(c3900.86,3595.86) v1@3893.18,3588.18 ; v1(3890,3585) CON7.35@3890,3699.65
  Bottom Layer w7: v1@3886.82,3588.18 ccw(c3879.14,3595.86) 3890,3595.86 ccw(c3900.86,3595.86) v1@3893.18,3588.18 ; v1@3886.82,4316.82 cw(c3879.14,4309.14) 3890,4309.14 cw(c3900.86,4309.14) v1@3893.18,4316.82 ; v1(3890,3585) v1(3890,4320)
LCD_VD13: CON5.15 CON7.34 | length 1063.8
  Top Layer w7: CON5.15@3615.59,4760 3615.59,4564.41 3910.04,4269.96 CON7.34@3910.04,3818.12
LCD_VD14: CON5.14 CON7.37 | length 1405.8
  Top Layer w7: CON5.14@3595.91,4760 3595.91,4554.1 v1(3850,4300) ; v1@3845.5,4300 ccw(c3834.64,4300) 3842.32,4307.68 ccw(c3850,4315.36) v1@3850,4304.5 ; v1@3866.82,3623.18 ccw(c3859.14,3630.86) 3870,3630.86 ccw(c3880.86,3630.86) v1@3873.18,3623.18 ; v1(3870,3620) CON7.37@3870,3699.33 ; 3870,3672.25 cw(c3875.92,3672.25) CON7.37@3871.73,3676.44
  Bottom Layer w7: v1@3846.82,4296.82 cw(c3839.14,4289.14) 3850,4289.14 cw(c3860.86,4289.14) v1@3853.18,4296.82 ; v1(3850,4300) 3850,3810 3870,3790 v1(3870,3620) ; v1@3866.82,3623.18 ccw(c3859.14,3630.86) 3870,3630.86 ccw(c3880.86,3630.86) v1@3873.18,3623.18
LCD_VD15: CON5.13 CON7.36 | length 1072
  Top Layer w7: CON5.13@3576.22,4760 3576.22,4543.78 3890.35,4229.65 CON7.36@3890.35,3818.12
LCD_VD16: CON7.39 U6.5 | length 2318.1
  Top Layer w7: v1@3847.8,3594.16 ccw(c3840.12,3601.84) 3850.98,3601.84 ccw(c3861.84,3601.84) v1@3854.16,3594.16 ; v1(3850.98,3590.98) CON7.39@3850.98,3700 ; v1@4711.82,4098.18 ccw(c4686.36,4123.64) 4722.36,4123.64 ; v1(4715,4095) 4722.36,4102.36 U6.5@4722.36,4200 ; v1@4716.77,4093.23 ccw(c4703.26,4106.74) 4722.36,4106.74 ; U6.5@4719.97,4171.03 cw(c4714.18,4165.24) 4722.36,4165.24 cw(c4730.55,4165.24) U6.5@4724.76,4171.03
  Bottom Layer w7: v1@3847.8,3594.16 ccw(c3840.12,3601.84) 3850.98,3601.84 ccw(c3861.84,3601.84) v1@3854.16,3594.16 ; v1(3850.98,3590.98) 3850.98,3789.22 3836,3804.2 3836,4224 3829,4231 3829,4365.21 4014.79,4551 4124,4551 4275,4400 4275,4300 4480,4095 v1(4715,4095) ; v1@4711.82,4091.82 ccw(c4704.14,4084.14) 4704.14,4095 ccw(c4704.14,4105.86) v1@4711.82,4098.18
LCD_VD17: CON7.38 U6.4 | length 1933.8
  Top Layer w7: v1@3867.49,3881.15 cw(c3859.81,3873.46) 3870.67,3873.46 cw(c3881.54,3873.46) v1@3873.85,3881.15 ; CON7.38@3870.67,3818.12 v1(3870.67,3884.33) ; v1@4686.82,4078.18 ccw(c4663.44,4101.56) 4696.5,4101.56 ; v1(4690,4075) 4696.5,4081.5 4696.5,4199.73 U6.4@4696.77,4200 ; v1@4691.77,4073.23 ccw(c4680.34,4084.66) 4696.5,4084.66 ; U6.4@4694.37,4171.03 cw(c4689.24,4165.9) 4696.5,4165.9 ; 4696.5,4164.59 cw(c4705.61,4164.59) U6.4@4699.17,4171.03
  Bottom Layer w7: v1@3867.49,3887.51 ccw(c3859.81,3895.19) 3870.67,3895.19 ccw(c3881.54,3895.19) v1@3873.85,3887.51 ; v1(3870.67,3884.33) 3870.67,4387.08 4020.59,4537 4113,4537 4260,4390 4260,4285 4470,4075 v1(4690,4075) ; v1@4686.82,4071.82 ccw(c4679.14,4064.14) 4679.14,4075 ccw(c4679.14,4085.86) v1@4686.82,4078.18
LCD_VD18: CON7.41 U6.3 | length 2155
  Top Layer w7: v1@3828.12,3649.48 ccw(c3820.44,3657.17) 3831.3,3657.17 ccw(c3842.17,3657.17) v1@3834.48,3649.48 ; v1(3831.3,3646.3) CON7.41@3831.3,3700 ; v1@4661.82,4118.18 ccw(c4639.21,4140.79) 4671.18,4140.79 ; v1(4665,4115) 4671.18,4121.18 U6.3@4671.18,4200 ; v1@4666.77,4113.23 ccw(c4656.11,4123.89) 4671.18,4123.89 ; U6.3@4668.78,4171.03 cw(c4663,4165.24) 4671.18,4165.24 cw(c4679.36,4165.24) U6.3@4673.58,4171.03
  Bottom Layer w7: v1@3826.8,3646.3 ccw(c3815.94,3646.3) 3823.62,3653.99 ccw(c3831.3,3661.67) v1@3831.3,3650.8 ; v1(3831.3,3646.3) 3815,3662.61 3815,4371.01 4008.99,4565 4145.2,4565 4285.1,4425.1 4292.5,4417.7 4292.5,4307.5 4485,4115 v1(4665,4115) ; v1@4661.82,4111.82 ccw(c4654.14,4104.14) 4654.14,4115 ccw(c4654.14,4125.86) v1@4661.82,4118.18
LCD_VD19: CON5.12 CON7.40 U6.1 | length 2466.4
  Top Layer w7: CON5.12@3556.53,4760 3556.53,4528.47 v1(3790,4295) 3850.98,4234.02 CON7.40@3850.98,3818.12 ; v1@3785.5,4295 ccw(c3774.64,4295) 3782.32,4302.68 ccw(c3790,4310.36) v1@3790,4299.5 ; v1@3790,4290.5 cw(c3790,4279.64) 3797.68,4287.32 cw(c3805.36,4295) v1@3794.5,4295 ; v1@4611.82,4138.18 ccw(c4592.06,4157.94) 4620,4157.94 ; v1(4615,4135) 4620,4140 U6.1@4620,4200 ; U6.1@4617.6,4171.03 cw(c4611.82,4165.24) 4620,4165.24 cw(c4628.18,4165.24) U6.1@4622.4,4171.03
  Bottom Layer w7: v1@3786.82,4298.18 ccw(c3779.14,4305.86) 3790,4305.86 ccw(c3800.86,4305.86) v1@3793.18,4298.18 ; v1(3790,4295) 3790,4365.8 4003.2,4579 4151,4579 4306.5,4423.5 4306.5,4313.5 4485,4135 v1(4615,4135) ; v1@4611.82,4131.82 ccw(c4604.14,4124.14) 4604.14,4135 ccw(c4604.14,4145.86) v1@4611.82,4138.18
LCD_VD20: CON5.10 CON7.43 U5.9 | length 2657.8
  Top Layer w7: CON5.10@3517.16,4760 3517.16,4537.84 v1(3756.04,4298.96) ; v1@3751.54,4298.96 ccw(c3740.68,4298.96) 3748.36,4306.64 ccw(c3756.04,4314.32) v1@3756.04,4303.46 ; v1@3811.61,3598.39 CON7.43@3811.61,3700 ; 3811.61,3614.05 ccw(c3834.05,3614.05) v1@3818.18,3598.18 ; v1(4325,4340) 4420,4340 4464.72,4295.28 U5.9@4464.72,4200 ; v1@4328.18,4336.82 cw(c4335.86,4329.14) 4335.86,4340 cw(c4335.86,4350.86) v1@4328.18,4343.18 ; U5.9@4462.33,4228.97 ccw(c4456.54,4234.76) 4464.72,4234.76 ccw(c4472.91,4234.76) U5.9@4467.12,4228.97
  Bottom Layer w7: v1@3752.86,4302.14 ccw(c3745.18,4309.82) 3756.04,4309.82 ccw(c3766.91,4309.82) v1@3759.22,4302.14 ; v1@3756.04,4294.46 cw(c3756.04,4283.59) 3763.72,4291.28 cw(c3771.41,4298.96) v1@3760.54,4298.96 ; 3810,3617.93 ccw(c3837.93,3617.93) v1@3818.18,3598.18 ; v1(3815,3595) 3810,3600 3810,3647.81 3801,3656.81 3801,4254 v1(3756.04,4298.96) 3756.04,4351.65 3997.4,4593 4157.6,4593 4325,4425.6 v1(4325,4340) ; v1@4321.82,4343.18 ccw(c4314.14,4350.86) 4325,4350.86 ccw(c4335.86,4350.86) v1@4328.18,4343.18
LCD_VD21: CON5.9 CON7.42 U5.8 | length 2326.9
  Top Layer w7: CON5.9@3497.48,4760 3497.48,4527.52 3831.3,4193.7 CON7.42@3831.3,3818.12 ; v1@3720.5,4300 ccw(c3709.64,4300) 3717.32,4307.68 ccw(c3725,4315.36) v1@3725,4304.5 ; v1@3725,4295.5 cw(c3725,4284.64) 3732.68,4292.32 cw(c3740.36,4300) v1@3729.5,4300 ; v1(4345,4315) 4410,4315 4439.13,4285.87 U5.8@4439.13,4200 ; v1@4348.18,4311.82 cw(c4355.86,4304.14) 4355.86,4315 cw(c4355.86,4325.86) v1@4348.18,4318.18 ; U5.8@4436.74,4228.97 ccw(c4430.95,4234.76) 4439.13,4234.76 ccw(c4447.32,4234.76) U5.8@4441.53,4228.97
  Bottom Layer w7: v1@3721.82,4303.18 ccw(c3714.14,4310.86) 3725,4310.86 ccw(c3735.86,4310.86) v1@3728.18,4303.18 ; v1(3725,4300) 3725,4340.4 3991.6,4607 4163.4,4607 4345,4425.4 v1(4345,4315) ; v1@4341.82,4318.18 ccw(c4334.14,4325.86) 4345,4325.86 ccw(c4355.86,4325.86) v1@4348.18,4318.18
LCD_VD22: CON5.8 CON7.45 U5.7 | length 2660.5
  Top Layer w7: CON5.8@3477.8,4760 3477.8,4517.2 v1(3699.06,4295.94) ; v1@3694.56,4295.94 ccw(c3683.7,4295.94) 3691.38,4303.62 ccw(c3699.06,4311.3) v1@3699.06,4300.44 ; v1@3786.82,3623.18 ccw(c3774.47,3635.53) 3791.93,3635.53 ; v1(3790,3620) 3791.93,3621.93 CON7.45@3791.93,3700 ; v1(4365,4295) 4405,4295 4413.54,4286.46 U5.7@4413.54,4200 ; v1@4368.18,4291.82 cw(c4375.86,4284.14) 4375.86,4295 cw(c4375.86,4305.86) v1@4368.18,4298.18 ; U5.7@4411.15,4228.97 ccw(c4405.36,4234.76) 4413.54,4234.76 ccw(c4421.73,4234.76) U5.7@4415.94,4228.97
  Bottom Layer w7: v1@3695.88,4299.12 ccw(c3688.2,4306.8) 3699.06,4306.8 ccw(c3709.93,4306.8) v1@3702.25,4299.12 ; v1@3699.06,4291.44 cw(c3699.06,4280.57) 3706.75,4288.25 cw(c3714.43,4295.94) v1@3703.56,4295.94 ; 3787,3638.11 ccw(c3808.11,3638.11) v1@3793.18,3623.18 ; v1(3790,3620) 3787,3623 3787,4208 v1(3699.06,4295.94) 3699.06,4334.26 3985.8,4621 4169.2,4621 4370,4420.2 4370,4300 v1(4365,4295) ; v1@4361.82,4298.18 ccw(c4342.06,4317.94) 4370,4317.94
LCD_VD23: CON5.7 CON7.44 U5.6 | length 2375.1
  Top Layer w7: CON5.7@3458.11,4760 3458.11,4506.89 3811.61,4153.39 CON7.44@3811.61,3818.12 ; v1@3669.93,4290.57 ccw(c3659.07,4290.57) 3666.75,4298.25 ccw(c3674.43,4305.93) v1@3674.43,4295.07 ; v1@3674.43,4286.07 cw(c3674.43,4275.2) 3682.11,4282.89 cw(c3689.8,4290.57) v1@3678.93,4290.57 ; v1@4381.82,4266.82 cw(c4367.01,4252.01) 4387.95,4252.01 ; v1(4385,4270) 4387.95,4267.05 U5.6@4387.95,4200 ; U5.6@4385.56,4228.97 ccw(c4379.77,4234.76) 4387.95,4234.76 ccw(c4396.14,4234.76) U5.6@4390.35,4228.97
  Bottom Layer w7: v1@3671.25,4293.75 ccw(c3663.57,4301.43) 3674.43,4301.43 ccw(c3685.3,4301.43) v1@3677.61,4293.75 ; v1(3674.43,4290.57) 3674.43,4329.43 3980,4635 4175,4635 4385,4425 v1(4385,4270) ; v1@4381.82,4273.18 ccw(c4374.14,4280.86) 4385,4280.86 ccw(c4395.86,4280.86) v1@4388.18,4273.18